# Altium PCB ResistorPatch2.PcbDoc
Units mm, origin at the board's own origin, x right, y up, seen from the top; angles counter-clockwise.
Board outline 22.99 x 19.43 mm, 2 copper layers (Top Layer, Bottom Layer); 2 components, 9 nets, 18 pads, 0 vias.
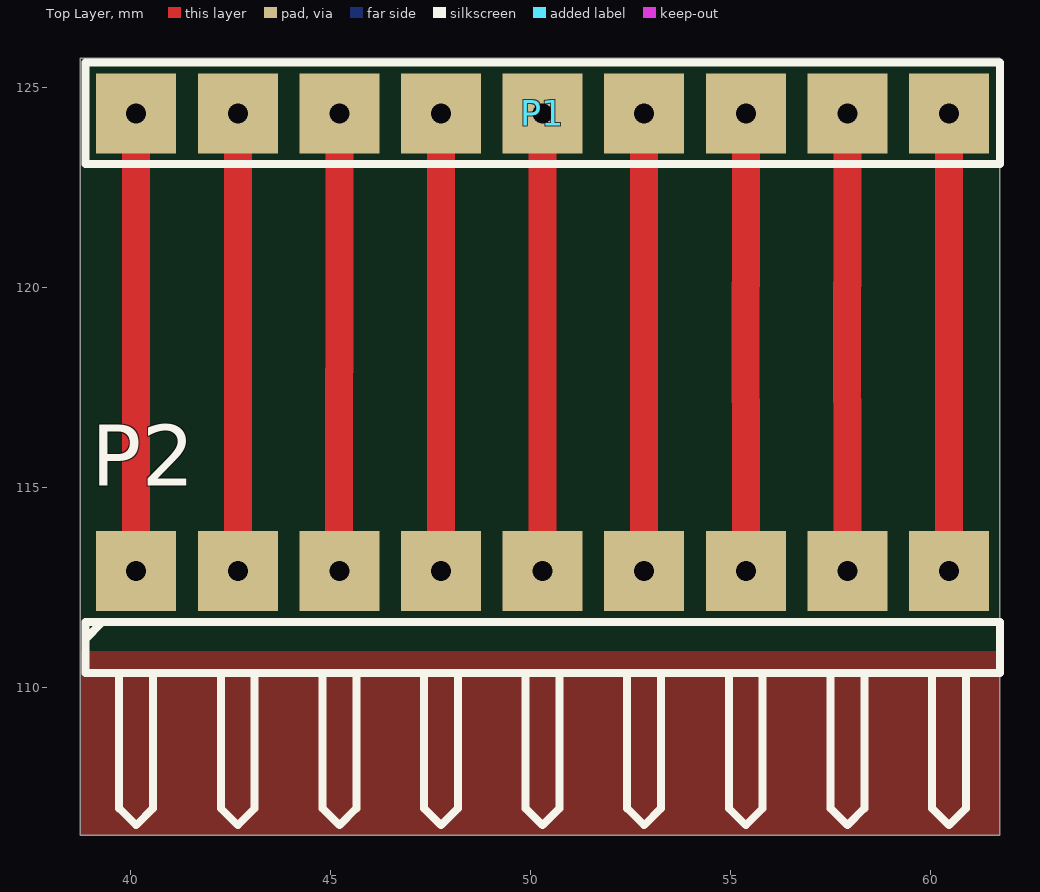
[diagram p0: Top Layer view]
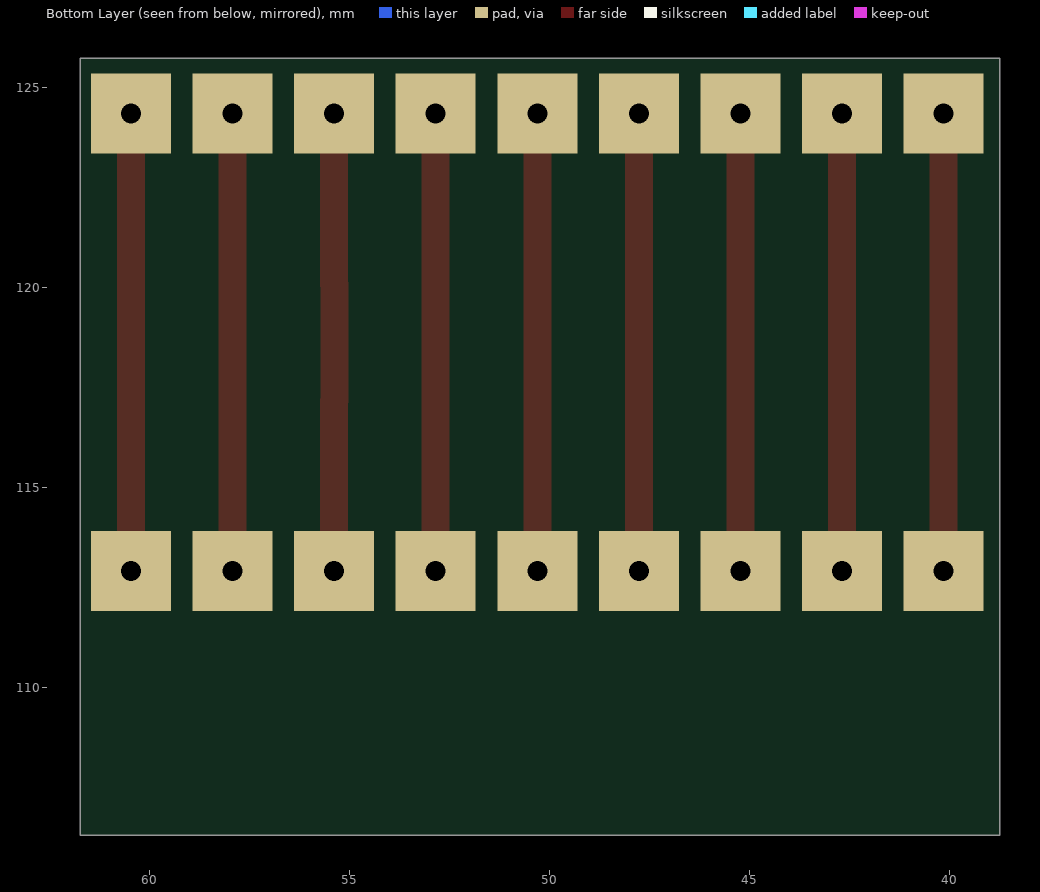
[diagram p1: Bottom Layer view, seen from below]

## Layer stack, top to bottom
Top Solder: solder mask 0.0102, Solder Resist, Dk 3.5
Top Layer: signal copper 0.0356
Dielectric 1: dielectric 0.32, FR-4, Dk 4.8
Bottom Layer: signal copper 0.0356
Bottom Solder: solder mask 0.0102, Solder Resist, Dk 3.5

## Board outline
38.735,106.299 61.722,106.299 61.722,125.73 38.735,125.73

## Design rules (kind name [scope] priority, off if disabled: settings)
Clearance Clearance_1 [InPolygon] p1: gap=1 ignorepadtopadclearanceinfootprint=FALSE
Clearance [All] p2: gap=0.254 ignorepadtopadclearanceinfootprint=FALSE except(0: Arc-Hole Track-Hole SMDPad-Hole THPad-Hole Via-Hole Fill-Hole Poly-Hole Region-Hole Text-Hole)
PolygonConnect [All] p1: connectstyle=Relief reliefconductorwidth=0.254 reliefentries=4 polygonreliefangle="90 Angle" airgapwidth=0.254
RoutingVias [All] p1: holewidth=0.711 width=1.27 viastyle="Through Hole" minholewidth=0.711 minwidth=1.27 maxholewidth=0.711 maxwidth=1.27
SolderMaskExpansion [All] p1: expansion=0.102
Width [All] p1: maxlimit=5 minlimit=0.254 preferedwidth=0.254
30 further rules are at their usual default settings.

## Components (designator, comment, footprint, x,y, rotation, side; value= is the part's Value field where it differs from the comment)
P1 "Header 9" HDR1X9 40.136,124.35 r0 top locked
P2 "Header 9H" HDR1X9H 40.136,112.903 r0 top

## Footprints (in the part's own frame and the unit in brackets; to place one, negate y for a bottom-side part, rotate by r counter-clockwise, add the part's x,y. Pads: shape width x height; smd on the part's side, far side on the other; paste and mask are expansions set on the pad)
HDR1X9 [mm] "Connector; Header; 9 Position"
  rect 2x2 hole 0.5: 1(0,0) 2(2.54,0) 3(5.08,0) 4(7.62,0) 5(10.16,0) 6(12.7,0) 7(15.24,0) 8(17.78,0) 9(20.32,0)
  silkscreen extent -1.27,-1.27 21.59,1.27
HDR1X9H [mm] "Connector; Header; 9 Position; Right Angle"
  rect 2x2 hole 0.5: 1(0,0) 2(2.54,0) 3(5.08,0) 4(7.62,0) 5(10.16,0) 6(12.7,0) 7(15.24,0) 8(17.78,0) 9(20.32,0)
  silkscreen extent -1.27,-6.35 21.59,-1.27

## Part data
P1: "Header, 9-Pin", LatestRevisionDate=17-Jul-2002, LatestRevisionNote="Re-released for DXP Platform.", Publisher="Altium Limited"
P2: "Header, 9-Pin, Right Angle", LatestRevisionDate=17-Jul-2002, LatestRevisionNote="Re-released for DXP Platform.", Publisher="Altium Limited"

## Nets (pads, with @x,y where several pads share a name; then routed paths per layer and width w, separated by ;. In a path a pad name is that pad's centre, name@x,y a point inside that pad or via, vN(x,y) a via of type N, cw(c..) or ccw(c..) an arc to the next point about the centre after c; other vN are vias at no path point)
NetP1_1: P1.1 P2.1 | length 11.4
  Top Layer w0.7: P2.1 40.136,119.318 P1.1
NetP1_2: P1.2 P2.2 | length 11.4
  Top Layer w0.7: P2.2 42.676,119.318 P1.2
NetP1_3: P1.3 P2.3 | length 11.5
  Top Layer w0.7: P2.3 45.212,112.907 45.212,117.918 45.216,117.922 P1.3
NetP1_4: P1.4 P2.4 | length 11.4
  Top Layer w0.7: P2.4 47.756,119.318 P1.4
NetP1_5: P1.5 P2.5 | length 11.4
  Top Layer w0.7: P2.5 P1.5
NetP1_6: P1.6 P2.6 | length 11.4
  Top Layer w0.7: P2.6 P1.6
NetP1_7: P1.7 P2.7 | length 11.5
  Top Layer w0.7: P2.7 55.376,117.164 55.372,117.168 55.372,120.068 55.376,120.072 P1.7
NetP1_8: P1.8 P2.8 | length 11.5
  Top Layer w0.7: P2.8 57.916,117.164 57.912,117.168 57.912,120.068 57.916,120.072 P1.8
NetP1_9: P1.9 P2.9 | length 11.5
  Top Layer w0.7: P2.9 60.456,117.164 60.452,117.168 60.452,120.068 60.456,120.072 P1.9

## Polygon pours and split planes (outlines as drawn)
no net on Top Layer "GND" (solid, pour order 0): 38.735,125.73 61.722,125.73 61.722,106.299 38.735,106.299